# EAGLE board tracksoar slightly smaller chip (EAGLE 7.2.0)
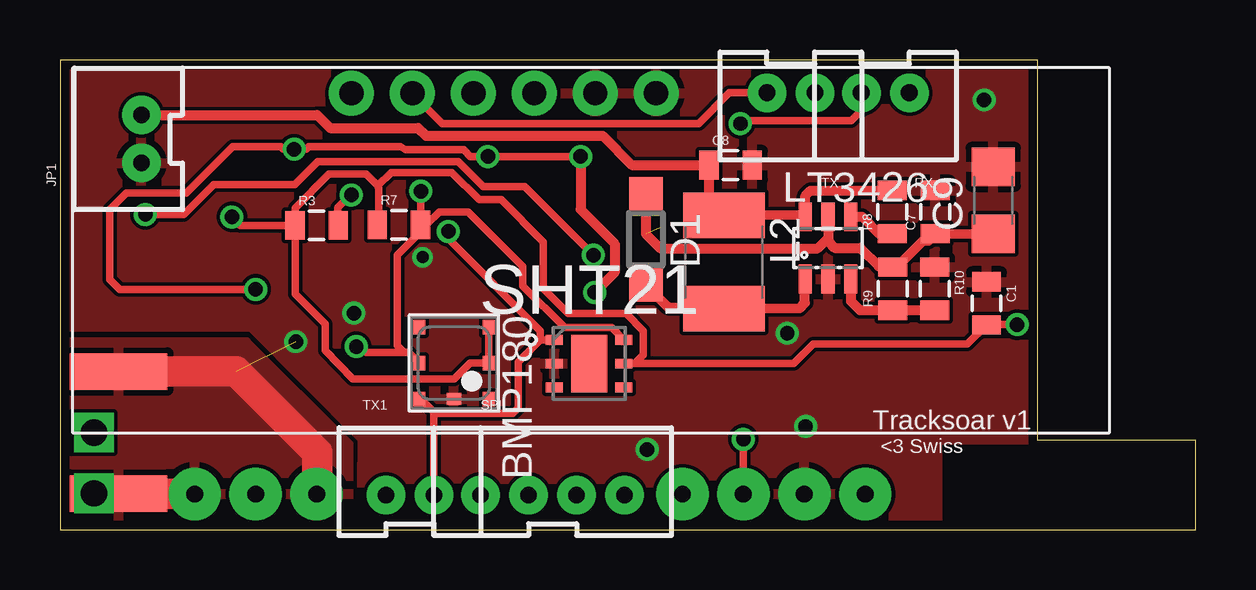
[diagram p0: board, top side]
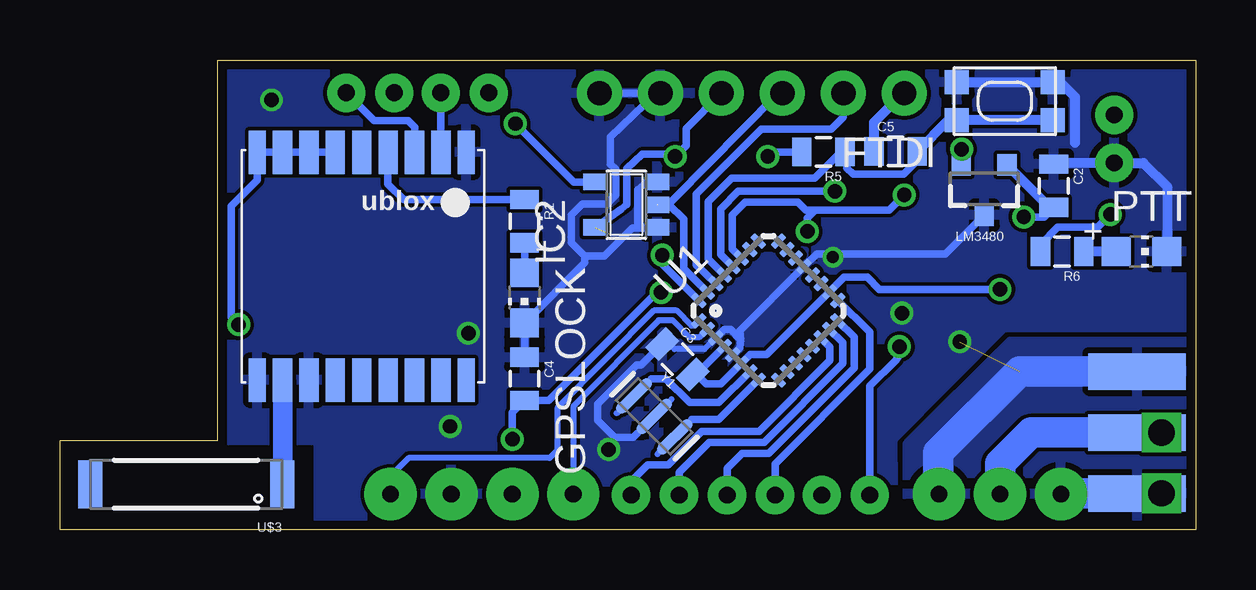
[diagram p1: board, bottom side, seen from below]

Size 47.32 x 19.6 mm. Coordinates in mm from the lower left corner, seen from the top.
Outline: 0,0 47.32,0 47.32,3.73 40.74,3.73 40.74,19.6 0,19.6 0,0
Copper layers (1*16): Top 0.0356mm / dielectric 1.5011mm / Bottom 0.0356mm
Design rules "oshpark-2layer": minimum track width 6mil, minimum drill 13mil, track to track 6mil, track to pad 6mil, pad to pad 6mil, via to via 6mil, smd to smd 6mil, copper to edge 15mil, drill to drill 6mil, minimum pad ring 7mil, minimum via ring 7mil, stop-mask expansion 4mil, vias tented up to drill 0mil, thermal gap 10mil

## Footprints (pad centres in the part's own frame; a part is rotated, then mirrored left to right if it is on the bottom)
BMP180 = smd 0.6 x 0.5: 1 1.5,1.45; 2 0,1.45; 3 -1.5,1.45; 4 -1.5,-1.45; 5 0,-1.45; 6 1.5,-1.45 | smd 0.5 x 0.6: 7 1.5,0
0805 = smd 0.8 x 1.2: 1 -0.9,0; 2 0.9,0
C1206 = smd 1.6 x 1.8: 1 -1.4,0; 2 1.4,0
SOD123 = smd 1.4 x 1.4: A 1.9,0; C -1.9,0
1X06_NO_SILK = drill 1.016 pad 1.88: 1 0,0; 2 2.54,0; 3 5.08,0; 4 7.62,0; 5 10.16,0; 6 12.7,0
CHIP-LED0805 = smd 1.2 x 1.2: A 0,-1.05; C 0,1.05
SOT23-5 = smd 0.69 x 0.99: 1 -0.95,-1.29; 2 0,-1.29; 3 0.95,-1.29; 4 0.95,1.3; 5 -0.95,1.3
SMA-EDGE = smd 1.524 x 4.064: GND@0 0,0; GND@1 5.08,0; SIG 2.54,0 | smd 1.524 x 4.064 bottom: GND@2 0,0; GND@3 5.08,0
JST-2-PTH-VERT = drill 0.7 pad 1.6: 1 -1,-0.55; 2 1,-0.55
L1812 = smd 1.9 x 3.4: 1 -1.95,0; 2 1.95,0
SOT23-3 = smd 0.8 x 0.9: 1 -0.95,-1; 2 0.95,-1; 3 0,1.1
SOT23-6 = smd 0.55 x 1.2: 1 -0.95,-1.3; 2 0,-1.3; 3 0.95,-1.3; 4 0.95,1.3; 5 0,1.3; 6 -0.95,1.3
DFN300X300X110-7N = smd 0.711 x 0.406: 1 -1.448,0.991; 2 -1.448,0; 3 -1.448,-0.991; 4 1.448,-0.991; 5 1.448,0; 6 1.448,0.991 | smd 1.499 x 2.388: 7 0,0
JST-4-PTH-VERT = drill 0.7 pad 1.6: 1 -3,-0.55; 2 -1,-0.55; 3 1,-0.55; 4 3,-0.55
KMR2 = smd 1 x 1: 1 2,0.8; 2 2,-0.8; 3 -2,0.8; 4 -2,-0.8
MLF32 = smd 0.7 x 0.3: 1 -2.35,1.75; 2 -2.35,1.25; 3 -2.35,0.75; 4 -2.35,0.25; 5 -2.35,-0.25; 6 -2.35,-0.75; 7 -2.35,-1.25; 8 -2.35,-1.75; 17 2.35,-1.75; 18 2.35,-1.25; 19 2.35,-0.75; 20 2.35,-0.25; 21 2.35,0.25; 22 2.35,0.75; 23 2.35,1.25; 24 2.35,1.75 | smd 0.3 x 0.7: 9 -1.75,-2.35; 10 -1.25,-2.35; 11 -0.75,-2.35; 12 -0.25,-2.35; 13 0.25,-2.35; 14 0.75,-2.35; 15 1.25,-2.35; 16 1.75,-2.35; 25 1.75,2.35; 26 1.25,2.35; 27 0.75,2.35; 28 0.25,2.35; 29 -0.25,2.35; 30 -0.75,2.35; 31 -1.25,2.35; 32 -1.75,2.35
UBLOX_MAX = smd 1.8 x 0.7: 1_GND 4.95,-4.4; 9_V_RESET 4.95,4.3; 10_GND -4.55,4.3; 18_RESERVED -4.55,-4.4 | smd 1.8 x 0.8: 2_TXD1 4.95,-3.35; 3_RXD1 4.95,-2.25; 4_TIMEPULSE 4.95,-1.15; 5_EXTINT0 4.95,-0.05; 6_V_BCKP 4.95,1.05; 7_VCC_IO 4.95,2.15; 8_VCC 4.95,3.25; 11_RF_IN -4.55,3.25; 12_GND -4.55,2.15; 13_ANTON -4.55,1.05; 14_VCC_RF -4.55,-0.05; 15_RESERVED -4.55,-1.15; 16_SDA2 -4.55,-2.25; 17_SCL2 -4.55,-3.35
RADIOMETRIX-HX1 = drill 0.7 pad 2.184: 0V 8.89,-10.16; EN 3.81,-10.16; RFGND -11.43,-10.16; RFGND2 -16.51,-10.16; RFOUT -13.97,-10.16; TXD 11.43,-10.16; VCC 6.35,-10.16
ANTENNA-CHIP4 = smd 1 x 2: NC 4,0; SIG -4,0
RESONATOR-SMD = smd 0.45 x 1.905: 1 -1.2,0; 2 0,0; 3 1.2,0

## Placement (x,y rotation side)
BMP180  BMP180  [BMP180]  16.41,6.96 270 top
C1  .1uf  [0805]  38.61,9.45 270 top
C2  .1uf  [0805]  5.92,14.35 270 bottom
C3  .1uf  [0805]  21.59,7.11 315 bottom
C4  .1uf  [0805]  27.97,6.3 270 bottom
C5  .1uf  [0805]  12.5,15.78 0 bottom
C7  22uf  [0805]  36.47,13.26 90 top
C8  10uf  [0805]  27.94,15.21 0 top
C9  100uf  [C1206]  38.89,13.74 90 top
D1  MBR120VLSFT1  [SOD123]  24.41,12.12 270 top
FRAME1  FRAME-LETTER  [CREATIVE_COMMONS]  14.81,-7.8 0 top  (outside the outline)
FTDI  [1X06_NO_SILK]  12.14,18.21 180 bottom
GPSLOCK  [CHIP-LED0805]  27.97,9.68 180 bottom
IC2  74AHC1G125DBV  [SOT23-5]  23.72,13.56 90 bottom
J$1  SMA_EDGE  [SMA-EDGE]  2.44,1.52 90 bottom
JP1  M02JST-PTH-VERT  [JST-2-PTH-VERT]  2.84,16.31 90 top
L2  2.2uh  [L1812]  27.66,11.18 270 top
LM3480  LM3480IM4  [SOT23-3]  8.81,14.22 180 bottom
LT3426  LT3426  [SOT23-6]  32,11.76 0 top
PTT  [CHIP-LED0805]  2.26,11.61 270 bottom
R1  100ohm  [0805]  27.97,12.88 270 bottom
R3  4.7k  [0805]  10.69,12.7 0 top
R5  10k  [0805]  15.51,15.76 180 bottom
R6  330ohm  [0805]  5.56,11.61 180 bottom
R7  4.7k  [0805]  14.12,12.73 0 top
R8  1m  [0805]  34.67,13.26 90 top
R9  95.3k  [0805]  34.7,10.06 90 top
R10  30.9k  [0805]  36.45,10.06 270 top
RX  RX  [JST-2-PTH-VERT]  34.39,17.68 180 top
SHT21  SHT21  [DFN300X300X110-7N]  22.05,6.93 0 top
SPI  [JST-4-PTH-VERT]  20.52,2.01 0 top
SW1  SPST_TACT-KMR2  [KMR2]  7.95,17.88 180 bottom
TX  TX  [JST-2-PTH-VERT]  30.45,17.68 180 top
TX1  TX  [JST-2-PTH-VERT]  14.58,2.01 0 top
U1  ATMEGA168MLF  [MLF32]  17.81,9.14 45 bottom
U$1  UBLOX_MAX  [UBLOX_MAX]  34.8,10.79 90 bottom
U$2  RADIOMETRIX-HX1  [RADIOMETRIX-HX1]  22.12,11.66 0 top
U$3  ANTENNA2SMD3  [ANTENNA-CHIP4]  42.06,1.91 180 bottom
Y1  16MHZ  [RESONATOR-SMD]  22.56,4.73 315 bottom

## Library data of the parts
BMP180 = SparkFun-Sensors
C1-C5 C7 C8 = SparkFun-Capacitors
C9 L2 = resistor
D1 = diode
FRAME1 = SparkFun-Aesthetics
FTDI = SparkFun-Connectors; PROD_ID: CONN-08437
GPSLOCK LT3426 PTT SW1 = adafruit
IC2 = 74xx-little-us
J$1 JP1 RX SPI TX TX1 = SparkFun-Connectors
LM3480 = SparkFun-PowerIC
R1 R3 R5-R10 = SparkFun-Resistors
SHT21 = sht21; MPN: SHT21; OC_FARNELL: 1855468; OC_NEWARK: 20T1172; PACKAGE: DFN-6; SUPPLIER: SENSIRION
U1 = SparkFun-DigitalIC
U$1 U$2 = Ava
U$3 = SparkFun-RF
Y1 = SparkFun-FreqCtrl; PROD_ID: XTAL-08900

## Nets
3V: BMP180.2 BMP180.3 C1.2 C2.2 LM3480.1 R3.1 R7.1 SHT21.5 U$1.6_V_BCKP U$1.7_VCC_IO U$1.8_VCC U$1.9_V_RESET
15V: C8.1 JP1.2 L2.1 LT3426.6 R8.2
D3: U1.1 U$2.TXD
D4: U1.2 U$2.EN
DTR: C5.1 FTDI.1
GND: BMP180.7 C1.1 C2.1 C3.1 C4.1 C7.2 C8.2 C9.2 FTDI.5 FTDI.6 GPSLOCK.C IC2.1 IC2.3 J$1.GND@0 J$1.GND@1 J$1.GND@2 J$1.GND@3 JP1.1 LM3480.3 LT3426.2 PTT.C R10.1 SHT21.2 SW1.2 SW1.4 U1.3 U1.5 U1.21 U$1.1_GND U$1.10_GND U$1.12_GND U$2.0V U$2.RFGND U$2.RFGND2 Y1.2
LED: R6.2 U1.32
MISO: SPI.2 U1.16
MOSI: SPI.3 U1.15
N$1: J$1.SIG U$2.RFOUT
N$3: GPSLOCK.A R1.2
N$6: U$1.11_RF_IN U$3.SIG
N$9: D1.A L2.2 LT3426.1
N$12: LT3426.4 R8.1
N$13: LT3426.3 R9.1 R10.2
N$14: U1.8 Y1.3
N$17: C5.2 R5.1 SW1.1 SW1.3 U1.29
N$26: U1.7 Y1.1
N$27: PTT.A R6.1
PPS: R1.1 U$1.4_TIMEPULSE
RX1: RX.1 U$1.3_RXD1
RXO: FTDI.2 TX.2 U1.30
SCK: SPI.1 U1.17
SCL: BMP180.5 R7.2 SHT21.6 TX1.1 U1.28
SDA: BMP180.6 R3.2 SHT21.1 TX1.2 U1.27
SS: SPI.4 U1.14
TX: TX.1 U$1.2_TXD1
TX1: IC2.4 RX.2
TXO: FTDI.3 IC2.2 U1.31
VCC: C3.2 C4.2 C7.1 C9.1 D1.C FTDI.4 IC2.5 LM3480.2 LT3426.5 R5.2 R9.2 U1.4 U1.6 U1.18 U$2.VCC

## Tracks (layer width: path | path; a pad name or v marks a point on that pad's centre or on a via)
3V  (via drill 0.6)
  Top 0.305: R3.1 7.52,12.7 v7.16,13.06 | R3.1 9.79,13.43 11.2,14.83 12.75,14.83 13.23,14.35 | 13.23,14.35 13.28,14.23 13.28,12.79 R7.1 | 13.23,14.35 13.79,14.91 16.33,14.91 17.47,13.77 18.39,13.77 20.14,12.01 20.14,10.06 21.18,9.02 23.6,9.02 24.31,8.31 24.31,7.29 23.95,6.93 SHT21.5 30.58,6.93 31.39,7.75 37.81,7.75 C1.2 38.62,8.56 v39.88,8.56 | R3.1 9.8,12.69 9.8,9.83 11.05,8.59 11.05,7.49 12.19,6.3 16.43,6.3 17.09,6.96 BMP180.2 BMP180.3
  Bottom 0.305: v7.16,13.06 6.31,13.06 C2.2 | U$1.6_V_BCKP U$1.7_VCC_IO U$1.8_VCC U$1.9_V_RESET 39.1,14.6 40.18,13.51 40.18,8.86 v39.88,8.56
  Bottom 0.406: C2.2 6.09,13.45 LM3480.1
15V
  Top 0.406: JP1.2 10.71,17.31 11.25,16.76 14.91,16.76 15.24,16.43 22.61,16.43 23.82,15.21 C8.1 27.04,13.88 27.79,13.13 28.45,13.13 L2.1 30.96,13.15 LT3426.6 31.05,13.93 31.27,14.15 34.66,14.15 R8.2
D3
  Bottom 0.254: U1.1 20.91,8.51 21.01,8.51 21.62,9.14 22.58,9.14 26.59,5.08 26.59,3.33 26.92,3 32.79,3 33.55,2.24 U$2.TXD
D4
  Bottom 0.254: U1.2 20.69,8.03 21.11,8.03 21.79,8.74 22.38,8.74 25.93,5.16 U$2.EN
DTR
  Bottom 0.406: FTDI.1 12.19,18.21 13.41,16.99 C5.1
GND  (via drill 0.5, 0.6, 1.1)  (1 unrouted)
  Top 1.27: J$1.GND@1 7.34,6.6 10.72,3.23 10.72,1.52 U$2.RFGND | U$2.RFGND2 1.37,1.5
  Bottom 0.254: U1.3 20.47,7.54 21.72,7.54 21.92,7.75 C3.1
  Bottom 0.305: U1.5 19,7.6 18.95,7.92 | 18.95,7.92 19.38,8.36 19.65,8.36 U1.3 | 18.95,7.92 19,8.3 U1.21 15.8,11.51 10.43,11.51 LM3480.3 | C4.1 GPSLOCK.C 25.45,11.14 25.45,11.43 | FTDI.6 22.48,18.21 | FTDI.5 22.48,18.21 | 22.48,18.21 24.38,16.38 24.38,15.27 24.16,15.04 24.16,13.97 24.54,13.59 25.55,13.59 26.01,13.13 26.01,11.99 25.45,11.43 | 25.45,11.43 24.64,11.43 23.47,12.6 22.99,12.6 | 22.99,12.6 22.45,12.6 IC2.1 | IC2.3 22.87,14.51 23.24,14.2 23.24,12.8 22.99,12.6 | C3.1 23.09,6.88 23.29,6.88 24.92,5.26 24.92,4.57 24.21,3.86 23.43,3.86 23.28,4.02
  Bottom 0.406: SW1.2 SW1.4 5.65,18.68 5.03,18.06 5.03,16.14 | PTT.C 1.19,11.62 1.19,14.33 2.17,15.31 JP1.1 5.86,15.31 C2.1
  Bottom 1.27: U$2.RFGND2 5.59,1.52 J$1.GND@2 | J$1.GND@1 7.34,6.6 10.72,3.23 10.72,1.52 U$2.RFGND
  other vias: 31.06,4.32 30.3,8.2 9.83,7.85 15.11,11.38 12.24,9.04 1.42,1.52 24.46,3.35 38.51,17.93
  pour Top: 0.03,19.58 41.71,19.58 41.71,3.76 36.55,3.76 36.55,0.03 12.57,0.03 12.62,3.78 7.98,8.46 0.03,8.46
  pour Bottom: 0.03,19.58 41.71,19.56 41.71,3.73 36.55,3.76 36.55,0.03 12.57,0.03 12.62,3.78 7.98,8.46 0.03,8.46
  pour Bottom: 0.03,7.85 7.75,7.85 12.01,3.58 12.01,0.03 0.03,0.03
  pour Top: 0.03,7.85 7.75,7.85 12.01,3.58 12.01,0.03 0.03,0.03
LED  (via drill 0.6)
  Top 0.305: v3.56,13.16 5.16,13.16 6.4,14.4 9.78,14.4 10.74,15.37 16.59,15.37 17.63,14.33 19.35,14.33 v22.22,11.46
  Bottom 0.305: R6.2 6.46,11.9 5.74,12.62 4.09,12.62 v3.56,13.16 | v22.22,11.46 22.22,11.09 U1.32
MISO
  Bottom 0.305: SPI.2 19.52,2.57 18.9,3.2 17.78,3.2 14.22,6.76 14.22,8.04 U1.16
MOSI
  Bottom 0.305: SPI.3 21.52,2.4 20.27,3.66 17.98,3.66 14.71,6.93 14.71,7.81 U1.15
N$1
  Bottom 1.27: J$1.SIG 6.86,4.06 8.15,2.77 U$2.RFOUT
N$3
  Bottom 0.305: R1.2 GPSLOCK.A
N$6
  Bottom 0.813: U$1.11_RF_IN 38.05,1.92 U$3.SIG
N$9
  Top 0.406: LT3426.1 31.04,10.44 31.04,9.47 30.82,9.25 L2.2 25.32,9.3 D1.A
N$12
  Top 0.406: LT3426.4 33.42,13.06 34.14,12.34 34.66,12.34 R8.1
N$13
  Top 0.406: R10.2 R9.1 34.69,9.17 33.32,9.17 32.95,9.54 LT3426.3
N$14
  Bottom 0.305: U1.8 19.87,4.6 20.99,4.6
N$17
  Bottom 0.305: C5.2 11.6,15.4 12.17,14.83 14.27,14.83 14.53,15.09 R5.1 14.79,15.76 15.87,14.68 19.33,14.68 20.32,13.69 20.32,11.3 U1.29
  Bottom 0.406: SW1.3 SW1.1 10.3,17.08 C5.2
N$18  (via drill 1.1)
  other vias: 1.42,4.06
N$26
  Bottom 0.305: U1.7 19.87,5.31 21.08,5.31 22.07,6.3 22.69,6.3
N$27
  Bottom 0.406: PTT.A R6.1
PPS
  Bottom 0.305: R1.1 33.01,13.78 33.65,14.43 U$1.4_TIMEPULSE
RX1
  Bottom 0.305: U$1.3_RXD1 32.55,16.8 32.82,17.07 34.23,17.07 RX.1
RXO
  Top 0.305: FTDI.2 15.93,16.94 26.62,16.94 27.89,18.24 29.45,18.24 TX.2
  Bottom 0.305: U1.30 20.8,11.06 20.8,14 18.11,16.71 15.19,16.71 14.68,17.22 FTDI.2
SCK
  Bottom 0.305: SPI.1 17.52,2.75 13.59,6.71 13.59,8.25 U1.17
SCL  (via drill 0.6)
  Top 0.305: R7.2 15.02,13.63 v15.04,14.12 | SHT21.6 22.99,8.43 21.03,8.43 19.29,10.17 U1.28 17.01,13.26 15.8,13.26 15.27,12.73 R7.2 | v12.34,7.65 12.5,7.65 12.75,7.39 14.35,7.39 | 14.35,7.39 14.53,7.39 BMP180.5 | R7.2 15.1,12.51 14.05,11.46 14.05,7.7 14.35,7.39
  Bottom 0.305: U1.28 19.79,11.48 19.79,13.39 19.05,14.12 v15.04,14.12 | TX1.1 13.58,6 12.5,7.06 12.24,7.44 v12.34,7.65
SDA  (via drill 0.6)
  Top 0.305: v12.14,13.97 12.12,13.97 11.58,13.44 11.58,12.71 R3.2 | BMP180.6 15.19,5.31 15.58,4.92 | 15.58,4.92 15.65,4.85 18.87,4.85 19.1,5.08 19.1,7.01 20.01,7.92 | 20.01,7.92 SHT21.1 | TX1.2 15.58,4.92 | 20.01,7.92 20.01,8.31 16.18,12.14 v16.18,12.45
  Bottom 0.305: U1.27 19.3,11.7 19.3,13.13 18.77,13.67 16.59,13.67 16.26,13.33 15.85,13.33 | 15.85,13.33 12.78,13.33 v12.14,13.97 | v16.18,12.45 16.18,13 15.85,13.33
SS
  Bottom 0.305: SPI.4 23.52,2.03 22.83,2.72 21.97,2.72 20.57,4.11 18.19,4.11 15.24,7.06 15.24,7.64 U1.14
TX
  Bottom 0.305: TX.1 U$1.2_TXD1
TX1  (via drill 0.6)
  Top 0.305: v28.35,16.94 28.47,17.07 32.97,17.07 33.4,17.5 RX.2
  Bottom 0.305: IC2.4 25.92,14.51 v28.35,16.94 28.47,17.07
TXO
  Bottom 0.305: FTDI.3 17.45,18.16 21.72,13.82 21.87,13.67 22.02,13.67 | 22.02,13.67 22.31,13.69 IC2.2 | U1.31 21.34,10.91 21.34,12.95 21.95,13.56 22.02,13.67
VCC  (via drill 0.6)  (1 unrouted)
  Top 0.305: v21.69,15.57 v17.83,15.57 17.09,15.57 16.81,15.85 14.4,15.85 14.17,15.98 10.36,15.98 10.26,15.87 v9.75,15.87 9.3,15.87 9.19,15.98 7.19,15.98 5.26,14.05 2.77,14.05 2.08,13.36 2.08,10.44 2.49,10.03 v8.15,10.03 | U$2.VCC v28.47,3.78
  Top 0.406: 34.66,11 34.11,11 33.35,11.76 32.28,11.76 32,12.04 LT3426.5 32,12.17 31.57,11.73 25.02,11.73 24.41,12.34 D1.C | 34.66,11 R9.2 | 34.66,11 34.9,11 35.97,12.06 36.18,12.06 C7.1 36.64,12.36 C9.1 | v21.69,15.57 21.69,13.36 23.11,11.94 23.11,10.74 v22.28,9.91
  Bottom 0.305: U1.4 20.78,6.53 C3.2 20.8,6.5 20.4,6.1 19.79,6.1 U1.6 18.57,7.32 17.87,7.32 U1.18 14.64,10.54 13.69,10.54 13.18,10.03 v8.15,10.03 | IC2.5 23.94,13.38 23.7,13.56 23.7,15.06 23.06,15.67 21.69,15.67 v21.69,15.57 21.23,16.03 21.23,16.74 FTDI.4 | v9.75,15.87 LM3480.2 | R5.2 17.49,15.76 v17.83,15.57 | v28.47,3.78 28.47,4.89 C4.2 27.7,5.4 26.95,5.41 22.45,9.91 v22.28,9.91

## Text on the board
tNames: Tracksoar v1 | <3 Swiss